# EAGLE board 7SEGMENT_V4 (EAGLE 7.7.0)
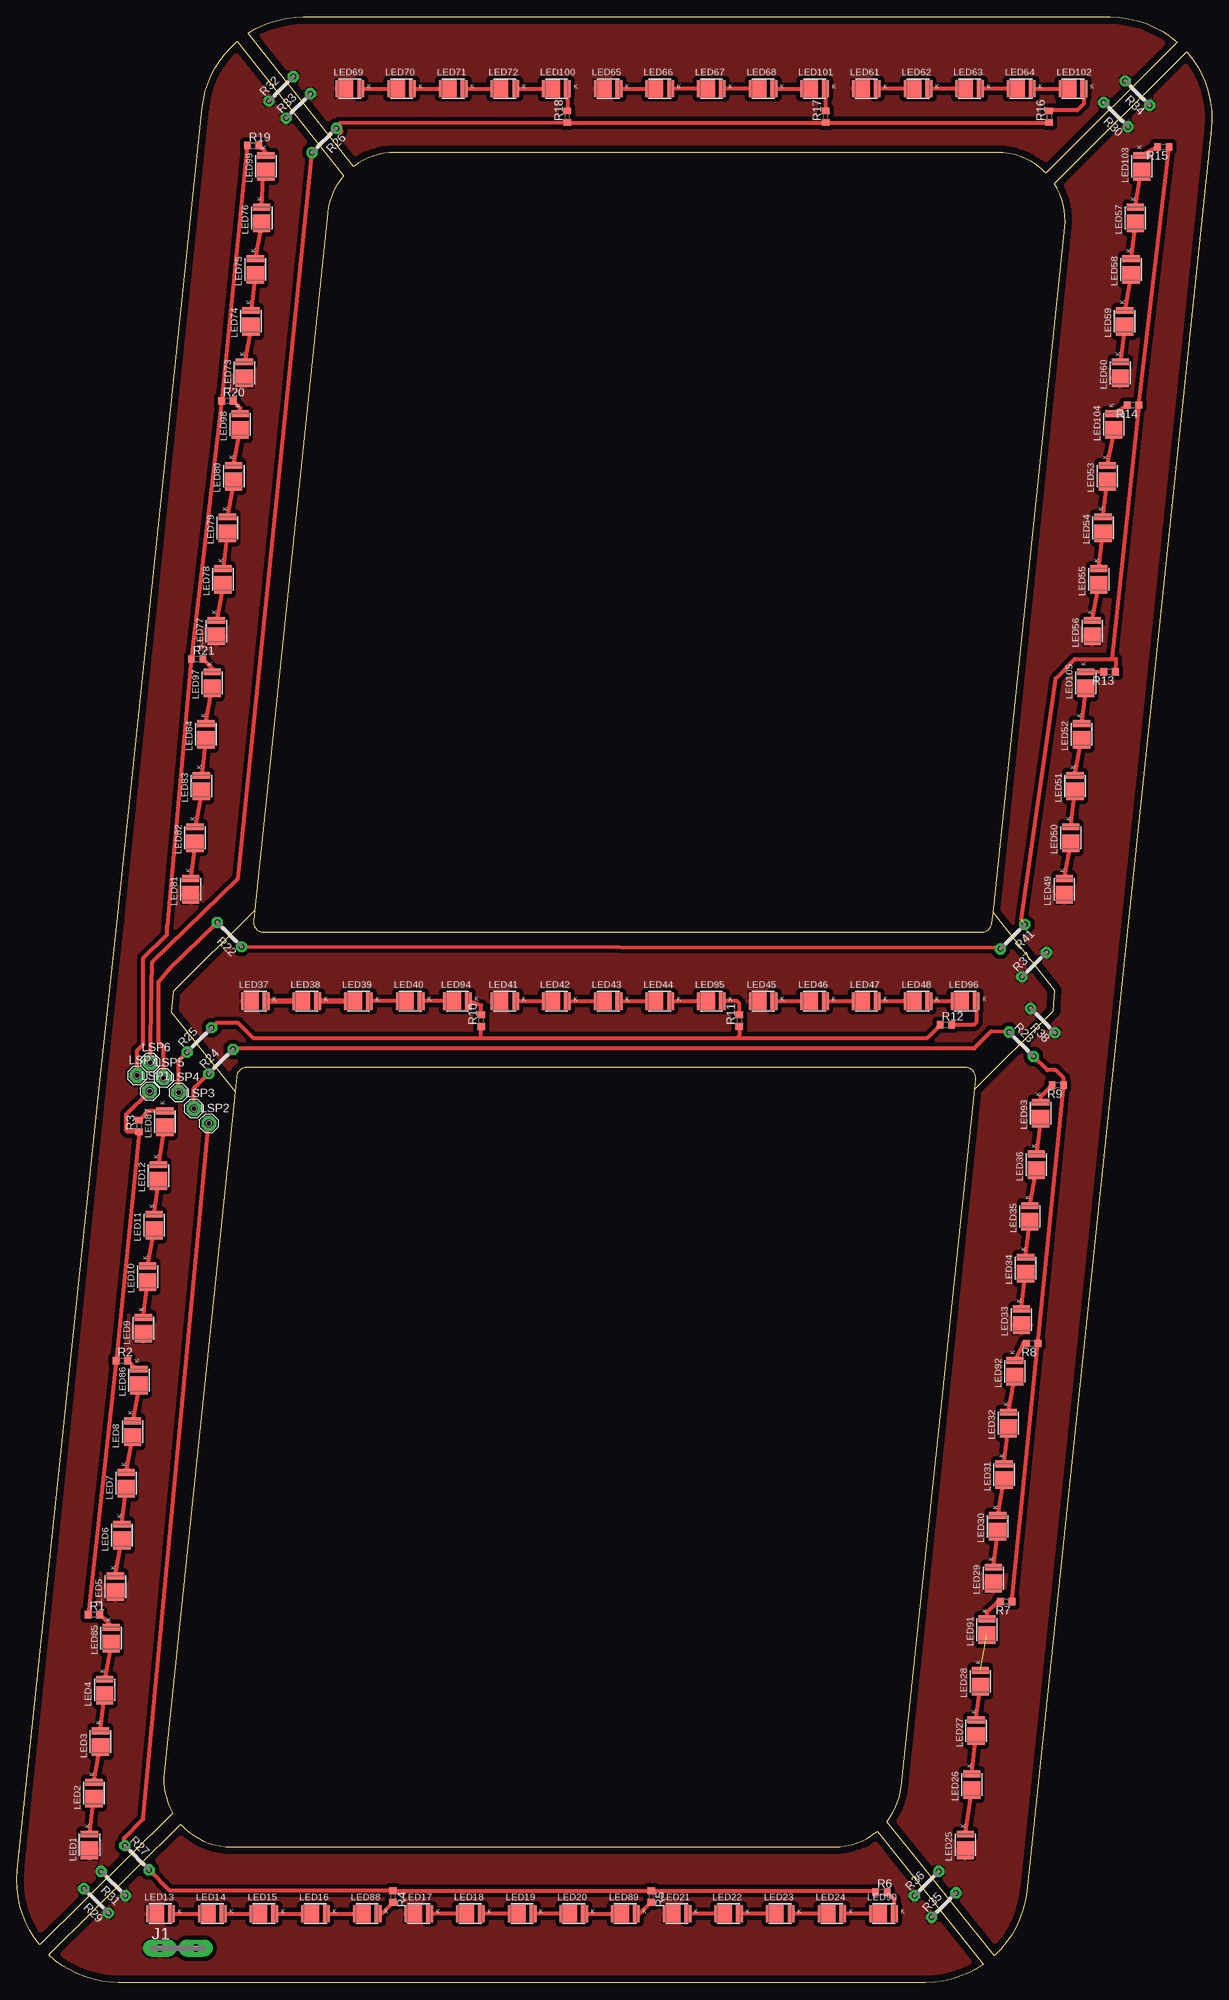
[diagram p0: board, top side]

Size 176.32 x 290 mm. Coordinates in mm from the lower left corner, seen from the top.
Outline: 144.04,157.85 143.88,156.34 arc-84 142.39,155 36.39,155 arc-96 34.9,156.66 35.06,158.15
Outline: 154.61,258.96 arc39 153.09,265.39
Outline: 172.64,284.85 arc-47 176.24,273.44
Outline: 148.98,13.43 arc-42 144.19,3.93
Outline: 128.36,23.74 arc33 130.5,28.95
Outline: 141.32,131.86 141.48,133.35 arc96 139.98,135 33.91,135 arc84 32.42,133.66 32.18,131.48
Outline: 27.34,276.56 arc-44 32.51,286.41
Outline: 48.2,266.55 arc35 45.81,261.04
Outline: 27.34,276.56 14.8,156.51 12.2,132.66 0.08,16.56 arc45 3.36,5.54 22.99,24.99 arc-36 21.7,31.05 32.18,131.48
Outline: 27.34,276.56 arc-44 32.51,286.41
Outline: 32.51,286.41 48.2,266.55
Outline: 48.2,266.55 arc35 45.81,261.04
Outline: 45.81,261.04 35.06,158.15
Outline: 35.06,158.15 23.04,146.19 22.79,143.21 32.18,131.48
Outline: 154.61,258.96 arc39 153.09,265.39
Outline: 153.09,265.39 172.64,284.85
Outline: 172.64,284.85 arc-47 176.24,273.44
Outline: 176.24,273.44 164.1,157.23 161.5,132.53 148.98,13.43
Outline: 144.04,157.85 153.12,146.36 152.94,143.37 141.32,131.86
Outline: 144.04,157.85 154.61,258.96
Outline: 148.98,13.43 arc-42 144.19,3.93
Outline: 144.19,3.93 128.36,23.74
Outline: 128.36,23.74 arc33 130.5,28.95
Outline: 130.5,28.95 141.32,131.86
Outline: 34.12,287.6 arc-33 42.26,290 161.32,290 arc-41 171.22,286.27 151.84,266.97 arc46 144.66,270 55.75,270 arc38 49.66,267.93 34.12,287.6
Outline: 142.63,2.69 arc-35 134.06,0 15,0 arc-43 4.72,4.08 24.18,23.35 arc48 31.65,20 120.56,20 arc40 126.94,22.3 142.63,2.69
Copper layers (1*16): Top 0.035mm / dielectric 1.5mm / Bottom 0.035mm
Design rules "default": minimum track width 10mil, minimum drill 24mil, track to track 8mil, track to pad 8mil, pad to pad 8mil, via to via 8mil, smd to smd 8mil, copper to edge 40mil, drill to drill 8mil, minimum pad ring 10mil, minimum via ring 8mil, stop-mask expansion 4mil, vias tented up to drill 0mil, thermal gap 10mil

## Footprints (pad centres in the part's own frame; a part is rotated, then mirrored left to right if it is on the bottom)
F061.040 = drill 1.1 pad 2.54 long: A1 -2.65,0; A2 2.65,0
LED_OF-SMD2835Y = smd 2.6 x 2.55: 1 -0.8,0 | smd 1 x 2.55: 2 1.6,0
MCS08 = drill 1.194 pad 2.159 octagon: MP 0,0
R0603 = smd 1 x 1.1: 1 -0.85,0; 2 0.85,0
05 = drill 0.813 pad 1.6 octagon: 1 -2.54,0; 2 2.54,0

## Placement (x,y rotation side)
J1  +12V  [F061.040]  23.74,5.08 0 top
LED1  [LED_OF-SMD2835Y]  10.72,20.32 90 top
LED2  [LED_OF-SMD2835Y]  11.36,27.94 90 top
LED3  [LED_OF-SMD2835Y]  12.31,35.56 90 top
LED4  [LED_OF-SMD2835Y]  12.94,43.18 90 top
LED5  [LED_OF-SMD2835Y]  14.53,58.42 90 top
LED6  [LED_OF-SMD2835Y]  15.48,66.04 90 top
LED7  [LED_OF-SMD2835Y]  16.12,73.66 90 top
LED8  [LED_OF-SMD2835Y]  17.07,81.28 90 top
LED9  [LED_OF-SMD2835Y]  18.66,96.52 90 top
LED10  [LED_OF-SMD2835Y]  19.29,104.14 90 top
LED11  [LED_OF-SMD2835Y]  20.25,111.76 90 top
LED12  [LED_OF-SMD2835Y]  20.88,119.06 90 top
LED13  [LED_OF-SMD2835Y]  21.2,10.16 0 top
LED14  [LED_OF-SMD2835Y]  28.82,10.16 0 top
LED15  [LED_OF-SMD2835Y]  36.44,10.16 0 top
LED16  [LED_OF-SMD2835Y]  44.06,10.16 0 top
LED17  [LED_OF-SMD2835Y]  59.3,10.16 0 top
LED18  [LED_OF-SMD2835Y]  66.92,10.16 0 top
LED19  [LED_OF-SMD2835Y]  74.54,10.16 0 top
LED20  [LED_OF-SMD2835Y]  82.16,10.16 0 top
LED21  [LED_OF-SMD2835Y]  97.4,10.16 0 top
LED22  [LED_OF-SMD2835Y]  105.02,10.16 0 top
LED23  [LED_OF-SMD2835Y]  112.64,10.16 0 top
LED24  [LED_OF-SMD2835Y]  120.26,10.16 0 top
LED25  [LED_OF-SMD2835Y]  139.94,20.32 90 top
LED26  [LED_OF-SMD2835Y]  140.9,29.21 90 top
LED27  [LED_OF-SMD2835Y]  141.53,37.15 90 top
LED28  [LED_OF-SMD2835Y]  142.17,44.45 90 top
LED29  [LED_OF-SMD2835Y]  144.07,59.69 90 top
LED30  [LED_OF-SMD2835Y]  144.71,67.31 90 top
LED31  [LED_OF-SMD2835Y]  145.66,74.93 90 top
LED32  [LED_OF-SMD2835Y]  146.29,82.55 90 top
LED33  [LED_OF-SMD2835Y]  148.2,97.79 90 top
LED34  [LED_OF-SMD2835Y]  148.83,105.41 90 top
LED35  [LED_OF-SMD2835Y]  149.47,113.03 90 top
LED36  [LED_OF-SMD2835Y]  150.42,120.65 90 top
LED37  [LED_OF-SMD2835Y]  35.17,144.78 0 top
LED38  [LED_OF-SMD2835Y]  42.79,144.78 0 top
LED39  [LED_OF-SMD2835Y]  50.41,144.78 0 top
LED40  [LED_OF-SMD2835Y]  58.03,144.78 0 top
LED41  [LED_OF-SMD2835Y]  72,144.78 0 top
LED42  [LED_OF-SMD2835Y]  79.62,144.78 0 top
LED43  [LED_OF-SMD2835Y]  87.24,144.78 0 top
LED44  [LED_OF-SMD2835Y]  94.86,144.78 0 top
LED45  [LED_OF-SMD2835Y]  110.1,144.78 0 top
LED46  [LED_OF-SMD2835Y]  117.72,144.78 0 top
LED47  [LED_OF-SMD2835Y]  125.34,144.78 0 top
LED48  [LED_OF-SMD2835Y]  132.96,144.78 0 top
LED49  [LED_OF-SMD2835Y]  154.55,161.29 90 top
LED50  [LED_OF-SMD2835Y]  155.5,168.91 90 top
LED51  [LED_OF-SMD2835Y]  156.14,176.53 90 top
LED52  [LED_OF-SMD2835Y]  157.09,184.15 90 top
LED53  [LED_OF-SMD2835Y]  160.9,222.25 90 top
LED54  [LED_OF-SMD2835Y]  160.26,214.63 90 top
LED55  [LED_OF-SMD2835Y]  159.63,207.01 90 top
LED56  [LED_OF-SMD2835Y]  158.68,199.39 90 top
LED57  [LED_OF-SMD2835Y]  165.03,260.35 90 top
LED58  [LED_OF-SMD2835Y]  164.39,252.73 90 top
LED59  [LED_OF-SMD2835Y]  163.44,245.11 90 top
LED60  [LED_OF-SMD2835Y]  162.8,237.49 90 top
LED61  [LED_OF-SMD2835Y]  125.34,279.4 0 top
LED62  [LED_OF-SMD2835Y]  132.96,279.4 0 top
LED63  [LED_OF-SMD2835Y]  140.58,279.4 0 top
LED64  [LED_OF-SMD2835Y]  148.2,279.4 0 top
LED65  [LED_OF-SMD2835Y]  87.24,279.4 0 top
LED66  [LED_OF-SMD2835Y]  94.86,279.4 0 top
LED67  [LED_OF-SMD2835Y]  102.48,279.4 0 top
LED68  [LED_OF-SMD2835Y]  110.1,279.4 0 top
LED69  [LED_OF-SMD2835Y]  49.14,279.4 0 top
LED70  [LED_OF-SMD2835Y]  56.76,279.4 0 top
LED71  [LED_OF-SMD2835Y]  64.38,279.4 0 top
LED72  [LED_OF-SMD2835Y]  72,279.4 0 top
LED73  [LED_OF-SMD2835Y]  33.58,237.49 90 top
LED74  [LED_OF-SMD2835Y]  34.53,245.11 90 top
LED75  [LED_OF-SMD2835Y]  35.17,252.73 90 top
LED76  [LED_OF-SMD2835Y]  36.12,260.35 90 top
LED77  [LED_OF-SMD2835Y]  29.45,199.39 90 top
LED78  [LED_OF-SMD2835Y]  30.41,207.01 90 top
LED79  [LED_OF-SMD2835Y]  31.04,214.63 90 top
LED80  [LED_OF-SMD2835Y]  31.99,222.25 90 top
LED81  [LED_OF-SMD2835Y]  25.64,161.29 90 top
LED82  [LED_OF-SMD2835Y]  26.28,168.91 90 top
LED83  [LED_OF-SMD2835Y]  27.23,176.53 90 top
LED84  [LED_OF-SMD2835Y]  27.87,184.15 90 top
LED85  [LED_OF-SMD2835Y]  13.9,50.8 90 top
LED86  [LED_OF-SMD2835Y]  18.02,88.9 90 top
LED87  [LED_OF-SMD2835Y]  21.83,127 90 top
LED88  [LED_OF-SMD2835Y]  51.68,10.16 0 top
LED89  [LED_OF-SMD2835Y]  89.78,10.16 0 top
LED90  [LED_OF-SMD2835Y]  127.88,10.16 0 top
LED91  [LED_OF-SMD2835Y]  143.12,52.07 90 top
LED92  [LED_OF-SMD2835Y]  147.25,90.17 90 top
LED93  [LED_OF-SMD2835Y]  151.06,128.27 90 top
LED94  [LED_OF-SMD2835Y]  65.01,144.78 0 top
LED95  [LED_OF-SMD2835Y]  102.48,144.78 0 top
LED96  [LED_OF-SMD2835Y]  139.94,144.78 0 top
LED97  [LED_OF-SMD2835Y]  28.82,191.77 90 top
LED98  [LED_OF-SMD2835Y]  32.95,229.87 90 top
LED99  [LED_OF-SMD2835Y]  36.76,267.97 90 top
LED100  [LED_OF-SMD2835Y]  79.62,279.4 0 top
LED101  [LED_OF-SMD2835Y]  117.72,279.4 0 top
LED102  [LED_OF-SMD2835Y]  155.82,279.4 0 top
LED103  [LED_OF-SMD2835Y]  165.98,267.97 90 top
LED104  [LED_OF-SMD2835Y]  161.85,229.87 90 top
LED105  [LED_OF-SMD2835Y]  157.72,191.77 90 top
LSP1  A  [MCS08]  19.56,131.5 0 top
LSP2  B  [MCS08]  28.32,126.74 0 top
LSP3  C  [MCS08]  26.11,128.96 0 top
LSP4  D  [MCS08]  23.85,131.34 0 top
LSP5  G  [MCS08]  21.63,133.48 0 top
LSP6  F  [MCS08]  19.66,135.73 0 top
LSP7  E  [MCS08]  17.75,133.82 0 top
R1  10R  [R0603]  11.36,54.29 0 top
R2  [R0603]  15.48,91.76 0 top
R3  [R0603]  18.02,126.36 90 top
R4  [R0603]  55.49,12.7 270 top
R5  [R0603]  93.59,12.7 270 top
R6  [R0603]  127.56,13.34 0 top
R7  [R0603]  145.98,56.2 180 top
R8  [R0603]  149.79,94.3 180 top
R9  [R0603]  153.6,132.4 180 top
R10  [R0603]  68.51,141.92 90 top
R11  [R0603]  106.61,141.92 90 top
R12  [R0603]  137.09,141.29 0 top
R13  10R  [R0603]  161.22,193.36 180 top
R14  [R0603]  164.71,232.73 180 top
R15  [R0603]  169.15,270.83 180 top
R16  [R0603]  152.33,275.27 90 top
R17  [R0603]  119.31,275.27 90 top
R18  [R0603]  81.21,275.27 90 top
R19  [R0603]  34.85,271.01 0 top
R20  [R0603]  31.04,233.36 0 top
R21  [R0603]  26.6,195.26 0 top
R22  0R  [05]  31.36,154.62 135 top
R23  0R  [05]  148.2,138.43 315 top
R24  0R  [05]  30.09,135.89 45 top
R25  0R  [05]  26.91,139.06 45 top
R26  0R  [05]  45.33,271.78 225 top
R27  0R  [05]  17.71,18.41 315 top
R29  0R  [05]  11.67,12.06 135 top
R30  0R  [05]  162.17,275.59 135 top
R31  0R  [05]  14.21,14.61 135 top
R32  0R  [05]  38.98,279.4 45 top
R33  0R  [05]  41.52,276.86 45 top
R34  0R  [05]  165.34,278.76 135 top
R35  0R  [05]  136.77,11.43 45 top
R36  0R  [05]  134.23,14.61 45 top
R37  0R  [05]  150.1,150.18 45 top
R38  0R  [05]  151.37,141.92 135 top
R41  0R  [05]  146.93,154.31 225 top

## Library data of the parts
J1 = con-faston; OC_FARNELL: unknown; OC_NEWARK: unknown
LED1-LED105 = OF-SMD2835Y; AVAILABILITY: Unavailable; DESCRIPTION: LED; SMD; 2835, PLCC2; yellow; 2200-2800mcd; 2.8x3.5x0.75mm; 120°; MF: Optoflash; MP: OF-SMD2835Y; PACKAGE: PLCC-2 Optoflash; PRICE: None
LSP1-LSP7 = solpad
R1-R21 = rcl
R22-R27 R29-R38 R41 = jumper

## Nets
+12V: J1.A1 LED1.1 LED5.1 LED9.1 LED13.1 LED17.1 LED21.1 LED25.1 LED29.1 LED33.1 LED37.1 LED41.1 LED45.1 LED49.1 LED56.1 LED60.1 LED61.1 LED65.1 LED69.1 LED73.1 LED77.1 LED81.1 R29.1 R29.2 R30.1 R30.2 R31.1 R31.2 R32.1 R32.2 R33.1 R33.2 R34.1 R34.2 R35.1 R35.2 R36.1 R36.2 R37.1 R37.2 R38.1 R38.2
N$1: LED1.2 LED2.1
N$2: LED2.2 LED3.1
N$3: LED3.2 LED4.1
N$4: LED5.2 LED6.1
N$5: LED6.2 LED7.1
N$6: LED7.2 LED8.1
N$7: LED9.2 LED10.1
N$8: LED10.2 LED11.1
N$9: LED11.2 LED12.1
N$10: LED13.2 LED14.1
N$11: LED14.2 LED15.1
N$12: LED15.2 LED16.1
N$13: LED17.2 LED18.1
N$14: LED18.2 LED19.1
N$15: LED19.2 LED20.1
N$16: LED21.2 LED22.1
N$17: LED22.2 LED23.1
N$18: LED23.2 LED24.1
N$19: LED25.2 LED26.1
N$20: LED26.2 LED27.1
N$21: LED27.2 LED28.1
N$22: LED29.2 LED30.1
N$23: LED30.2 LED31.1
N$24: LED31.2 LED32.1
N$25: LED33.2 LED34.1
N$26: LED34.2 LED35.1
N$27: LED35.2 LED36.1
N$28: LED37.2 LED38.1
N$29: LED38.2 LED39.1
N$30: LED39.2 LED40.1
N$31: LED41.2 LED42.1
N$32: LED42.2 LED43.1
N$33: LED43.2 LED44.1
N$34: LED45.2 LED46.1
N$35: LED46.2 LED47.1
N$36: LED47.2 LED48.1
N$37: LED49.2 LED50.1
N$38: LED85.2 R1.2
N$39: LED53.1 LED54.2
N$40: LED54.1 LED55.2
N$41: LSP5.MP R22.2
N$42: LED58.1 LED59.2
N$43: LED57.1 LED58.2
N$44: LED61.2 LED62.1
N$45: LED62.2 LED63.1
N$46: LED63.2 LED64.1
N$47: LED65.2 LED66.1
N$48: LED66.2 LED67.1
N$49: LED67.2 LED68.1
N$50: LED69.2 LED70.1
N$51: LED70.2 LED71.1
N$52: LED71.2 LED72.1
N$53: LED73.2 LED74.1
N$54: LED74.2 LED75.1
N$55: LED75.2 LED76.1
N$56: LED77.2 LED78.1
N$57: LED78.2 LED79.1
N$58: LED79.2 LED80.1
N$59: LED81.2 LED82.1
N$60: LED82.2 LED83.1
N$61: LED83.2 LED84.1
N$62: LED50.2 LED51.1
N$63: LED51.2 LED52.1
N$64: LED4.2 LED85.1
N$65: LED8.2 LED86.1
N$66: LED86.2 R2.2
N$67: LED87.2 R3.2
N$68: LED12.2 LED87.1
N$69: LED16.2 LED88.1
N$70: LED20.2 LED89.1
N$71: LED24.2 LED90.1
N$72: LED88.2 R4.2
N$73: LED89.2 R5.2
N$74: LED90.2 R6.2
N$75: LED28.2 LED91.1
N$76: LED32.2 LED92.1
N$77: LED55.1 LED56.2
N$78: LED59.1 LED60.2
N$79: LED36.2 LED93.1
N$80: LED40.2 LED94.1
N$81: LED44.2 LED95.1
N$82: LED48.2 LED96.1
N$83: LED84.2 LED97.1
N$84: LED80.2 LED98.1
N$85: LED76.2 LED99.1
N$86: R4.1 R5.1 R6.1 R27.2
N$87: R7.1 R8.1 R9.1 R23.2
N$88: R10.1 R11.1 R12.1 R25.2
N$89: R22.1 R41.2
N$90: R16.1 R17.1 R18.1 R26.1
N$91: LSP1.MP R1.1 R2.1 R3.1
N$92: R13.1 R14.1 R15.1 R41.1
N$93: LSP7.MP R19.1 R20.1 R21.1
N$94: LSP2.MP R27.1
N$95: LSP3.MP R24.1
N$96: LSP4.MP R25.1
N$97: R23.1 R24.2
N$98: LSP6.MP R26.2
N$99: LED72.2 LED100.1
N$100: LED68.2 LED101.1
N$101: LED64.2 LED102.1
N$102: LED57.2 LED103.1
N$103: LED52.2 LED105.1
N$104: LED91.2 R7.2
N$105: LED92.2 R8.2
N$106: LED93.2 R9.2
N$107: LED94.2 R10.2
N$108: LED95.2 R11.2
N$109: LED96.2 R12.2
N$110: LED97.2 R21.2
N$111: LED98.2 R20.2
N$112: LED99.2 R19.2
N$113: LED100.2 R18.2
N$114: LED101.2 R17.2
N$115: LED102.2 R16.2
N$116: LED103.2 R15.2
N$117: LED104.2 R14.2
N$118: LED105.2 R13.2
N$119: LED53.2 LED104.1

## Tracks (layer width: path | path; a pad name or v marks a point on that pad's centre or on a via)
+12V  (4 unrouted)
  pour Top (isolate 0.61): 54.34,270 144.84,270 arc-46 151.84,267 171.34,286.5 169.84,287.5 167.84,288.5 164.84,289.5 162.34,290 42.34,290 arc35 34.34,287.5 49.84,268 51.34,269 52.34,269.5
  pour Top (isolate 0.61): 153.34,265.5 172.34,284.5 172.84,285 174.34,283 175.84,279.5 176.34,276.5 176.34,274 149.34,16 arc-33 144.34,4 128.34,24 129.34,25.5 130.34,27.5 141.34,132 152.84,143.5 152.84,146.5 144.34,158 154.84,259.5 154.84,261.5 154.34,263
  pour Top (isolate 0.61): 36.34,155 142.34,155 142.84,155 arc90 143.84,156 143.84,158 153.34,146 153.34,143.5 141.34,132 141.53,133.35 141.53,133.81 arc90 140.34,135 33.84,135 arc90 32.34,133.5 32.34,131.5 22.84,143 23.34,146 35.34,158.5 35.34,156 arc90
  pour Top (isolate 0.61): 29.84,20 120.84,20 arc37 126.84,22 142.48,2.86 140.34,1.5 137.84,0.5 134.84,0 14.84,0 arc-44 4.84,4 24.34,23.5 25.34,22 27.84,20.5
  pour Top (isolate 0.61): 21.84,31 32.34,131.5 22.84,143 22.84,146 34.84,158 45.84,260 arc-30 48.34,266.5 32.34,286.5 30.34,284.5 28.84,282 27.84,279 27.34,276.5 -0.16,16.5 arc47 3.34,5.5 22.84,24.5 23.1,24.77 22.34,26.5 21.84,28 21.84,30
N$1
  Top 0.61: LED1.2 LED2.1
N$2
  Top 0.61: LED2.2 LED3.1
N$3
  Top 0.61: LED3.2 LED4.1
N$4
  Top 0.61: LED5.2 LED6.1
N$5
  Top 0.61: LED6.2 LED7.1
N$6
  Top 0.61: LED7.2 LED8.1
N$7
  Top 0.61: LED9.2 LED10.1
N$8
  Top 0.61: LED10.2 LED11.1
N$9
  Top 0.61: LED11.2 LED12.1
N$10
  Top 0.61: LED13.2 LED14.1
N$11
  Top 0.61: LED14.2 LED15.1
N$12
  Top 0.61: LED15.2 LED16.1
N$13
  Top 0.61: LED18.1 LED17.2
N$14
  Top 0.61: LED19.1 LED18.2
N$15
  Top 0.61: LED20.1 LED19.2
N$16
  Top 0.61: LED22.1 LED21.2
N$17
  Top 0.61: LED23.1 LED22.2
N$18
  Top 0.61: LED24.1 LED23.2
N$19
  Top 0.61: LED25.2 LED26.1
N$20
  Top 0.61: LED26.2 LED27.1
N$21
  Top 0.61: LED27.2 LED28.1
N$22
  Top 0.61: LED29.2 LED30.1
N$23
  Top 0.61: LED30.2 LED31.1
N$24
  Top 0.61: LED31.2 LED32.1
N$25
  Top 0.61: LED33.2 LED34.1
N$26
  Top 0.61: LED34.2 LED35.1
N$27
  Top 0.61: LED35.2 LED36.1
N$28
  Top 0.813: LED38.1 LED37.2
N$29
  Top 0.813: LED38.2 LED39.1
N$30
  Top 0.61: LED40.1 LED39.2
N$31
  Top 0.61: LED41.2 LED42.1
N$32
  Top 0.61: LED42.2 LED43.1
N$33
  Top 0.61: LED43.2 LED44.1
N$34
  Top 0.61: LED45.2 LED46.1
N$35
  Top 0.61: LED46.2 LED47.1
N$36
  Top 0.61: LED47.2 LED48.1
N$37
  Top 0.61: LED49.2 LED50.1
N$38
  Top 0.61: LED85.2 13.89,52.6 R1.2
N$39
  Top 0.61: LED54.2 LED53.1
N$40
  Top 0.61: LED55.2 LED54.1
N$41
  Top 0.61: 29.13,156.84 R22.2 22.47,149.52 21.2,147.97 20.88,147.66 20.88,138.75 21.63,138 LSP5.MP
N$42
  Top 0.61: LED58.1 LED59.2
N$43
  Top 0.61: LED57.1 LED58.2
N$44
  Top 0.61: LED62.1 LED61.2
N$45
  Top 0.61: LED63.1 LED62.2
N$46
  Top 0.61: LED64.1 LED63.2
N$47
  Top 0.61: LED65.2 LED66.1
N$48
  Top 0.61: LED67.1 LED66.2
N$49
  Top 0.61: LED68.1 LED67.2
N$50
  Top 0.61: LED69.2 LED70.1
N$51
  Top 0.61: LED70.2 LED71.1
N$52
  Top 0.61: LED71.2 LED72.1
N$53
  Top 0.61: LED74.1 LED73.2
N$54
  Top 0.61: LED75.1 LED74.2
N$55
  Top 0.61: LED76.1 LED75.2
N$56
  Top 0.61: LED78.1 LED77.2
N$57
  Top 0.61: LED79.1 LED78.2
N$58
  Top 0.61: LED80.1 LED79.2
N$59
  Top 0.61: LED82.1 LED81.2
N$60
  Top 0.61: LED83.1 LED82.2
N$61
  Top 0.61: LED84.1 LED83.2
N$62
  Top 0.61: LED50.2 LED51.1
N$63
  Top 0.61: LED51.2 LED52.1
N$64
  Top 0.61: LED85.1 LED4.2
N$65
  Top 0.61: LED86.1 LED8.2
N$66
  Top 0.61: LED86.2 17.59,90.5 R2.2
N$67
  Top 0.61: LED87.2 21.82,128.59 19.4,128.59 R3.2
N$68
  Top 0.61: LED12.2 LED87.1
N$69
  Top 0.61: LED16.2 LED88.1
N$70
  Top 0.61: LED20.2 LED89.1
N$71
  Top 0.61: LED90.1 LED24.2
N$72
  Top 0.61: LED88.2 53.8,10.16 R4.2
N$73
  Top 0.61: LED89.2 91.9,10.16 R5.2
N$74
  Top 0.61: LED90.2 129.48,12.27 R6.2
N$75  (1 unrouted)
N$76
  Top 0.61: LED32.2 LED92.1
N$77
  Top 0.61: LED56.2 LED55.1
N$78
  Top 0.61: LED59.1 LED60.2
N$79
  Top 0.61: LED93.1 LED36.2
N$80
  Top 0.61: LED94.1 LED40.2
N$81
  Top 0.61: LED44.2 LED95.1
N$82
  Top 0.61: LED48.2 LED96.1
N$83
  Top 0.61: LED84.2 LED97.1
N$84
  Top 0.61: LED80.2 LED98.1
N$85
  Top 0.61: LED76.2 36.44,267.97 LED99.1
N$86
  Top 0.61: 20.03,16.09 R27.2 22.57,13.55 R4.1 R5.1 126.49,13.55 R6.1
N$87
  Top 0.61: R7.1 R8.1 R9.1 154.44,133.45 153.28,134.62 152.01,134.62 R23.2
N$88
  Top 0.61: R25.2 29.45,141.6 32.63,141.6 34.85,139.38 68.51,139.38 | 68.51,139.38 106.29,139.38 | 106.29,139.38 134.33,139.38 R12.1 | 68.51,139.38 R10.1 | R11.1 106.6,139.7 106.29,139.38
N$89
  Top 0.61: R22.1 144.72,152.73 R41.2
N$90
  Top 0.61: R16.1 R17.1 R18.1 47.55,274.32 47.87,273.05 R26.1
N$91
  Top 0.61: R1.1 R2.1 R3.1 16.33,125.52 16.12,125.73 16.12,128.06 LSP1.MP
N$92  (1 unrouted)
  Top 0.61: 148.2,156.84 153.28,192.41 156.14,195.26 161.53,195.26 | 161.53,195.26 162.17,195.26 R13.1 | R15.1 R14.1 161.53,195.26
N$93
  Top 0.61: R19.1 R20.1 R21.1 22.15,155.89 22.15,154.62 18.66,151.13 18.66,138.43 17.75,137.52 LSP7.MP
N$94
  Top 0.61: R27.1 15.81,21.29 18.66,24.13 LSP2.MP
N$95
  Top 0.61: R24.1 26.11,131.91 LSP3.MP
N$96
  Top 0.61: LSP4.MP 23.85,136 R25.1
N$97
  Top 0.61: R23.1 143.74,140.32 141.21,137.79 31.99,137.79 R24.2
N$98
  Top 0.61: R26.2 32.63,162.88 19.98,150.55 LSP6.MP
N$99
  Top 0.61: LED72.2 LED100.1
N$100
  Top 0.61: LED68.2 LED101.1
N$101
  Top 0.61: LED64.2 LED102.1
N$102
  Top 0.61: LED57.2 165.98,267.97 LED103.1
N$103
  Top 0.61: LED105.1 LED52.2
N$104
  Top 0.61: R7.2 144.71,56.2 143.12,54.61 LED91.2
N$105
  Top 0.61: R8.2 148.5,94.3 LED92.2
N$106
  Top 0.61: LED93.2 151.06,130.71 R9.2
N$107
  Top 0.61: R10.2 68.51,144.16 LED94.2
N$108
  Top 0.61: R11.2 106.6,144.46 106.29,144.78 LED95.2
N$109
  Top 0.61: LED96.2 141.54,141.62 141.21,141.29 R12.2
N$110
  Top 0.61: LED97.2 28.82,193.89 R21.2
N$111
  Top 0.61: LED98.2 32.95,232.31 R20.2
N$112
  Top 0.61: LED99.2 36.75,269.95 R19.2
N$113
  Top 0.61: LED100.2 81.22,276.13 R18.2
N$114
  Top 0.61: LED101.2 119.32,276.13 R17.2
N$115
  Top 0.61: LED102.2 157.42,277.19 156.45,276.23 152.43,276.23 R16.2
N$116
  Top 0.61: LED103.2 R15.2
N$117
  Top 0.61: LED104.2 R14.2
N$118
  Top 0.61: R13.2 LED105.2
N$119
  Top 0.61: LED53.2 162.17,229.87 LED104.1